# EAGLE board Satellite boards (EAGLE 5.09)
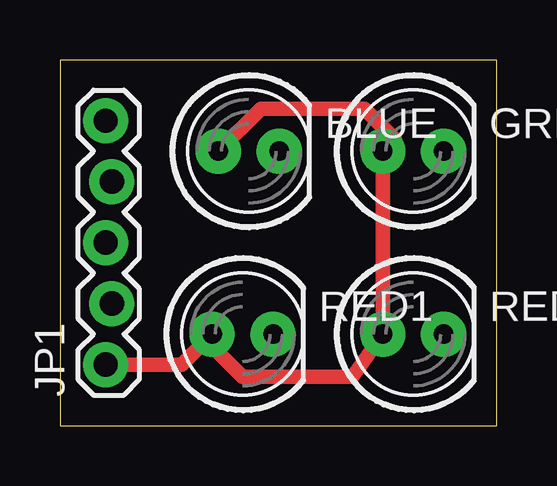
[diagram p0: board, top side]
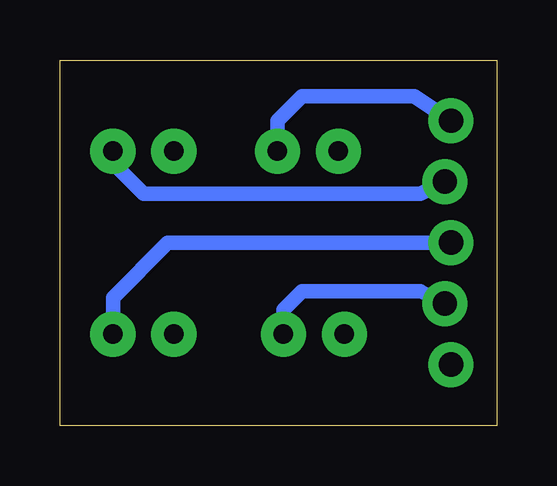
[diagram p1: board, bottom side, seen from below]

Size 18.21 x 15.23 mm. Coordinates in mm from the lower left corner, seen from the top.
Outline: 0,0 18.21,0 18.21,15.23 0,15.23 0,0
Copper layers (1*16): Top 0.035mm / dielectric 1.5mm / Bottom 0.035mm
Design rules "default": minimum track width 10mil, minimum drill 24mil, track to track 8mil, track to pad 8mil, pad to pad 8mil, via to via 8mil, smd to smd 8mil, copper to edge 40mil, drill to drill 8mil, minimum pad ring 10mil, minimum via ring 8mil, stop-mask expansion 4mil, vias tented up to drill 0mil, thermal gap 10mil

## Footprints (pad centres in the part's own frame; a part is rotated, then mirrored left to right if it is on the bottom)
LED5MM = drill 0.813 pad 1.88 round: A -1.27,0; K 1.27,0
1X05_LOCK = drill 1.016 pad 1.88 round: 1 0,0.127; 2 2.54,-0.127; 3 5.08,0.127; 4 7.62,-0.127; 5 10.16,0.127

## Placement (x,y rotation side)
BLUE  [LED5MM]  7.87,11.43 0 top
GREEN  [LED5MM]  14.73,11.43 0 top
JP1  [1X05_LOCK]  2.03,2.54 90 top
RED1  [LED5MM]  7.62,3.81 0 top
RED2  [LED5MM]  14.73,3.81 0 top

## Library data of the parts
BLUE GREEN JP1 RED1 RED2 = SparkFun

## Nets
N$1: BLUE.A GREEN.A JP1.1 RED1.A RED2.A
N$2: JP1.2 RED1.K
N$3: JP1.3 RED2.K
N$4: GREEN.K JP1.4
N$5: BLUE.K JP1.5

## Tracks (layer width: path | path; a pad name or v marks a point on that pad's centre or on a via)
N$1
  Top 0.61: JP1.1 5.08,2.54 RED1.A 6.35,3.3 7.62,2.03 12.19,2.03 RED2.A GREEN.A 13.97,11.94 12.7,13.21 8.38,13.21 BLUE.A
N$2
  Bottom 0.61: RED1.K 8.89,4.83 8.13,5.59 3.17,5.59 JP1.2
N$3
  Bottom 0.61: RED2.K 16,5.33 13.72,7.62 JP1.3
N$4
  Bottom 0.61: GREEN.K 16,10.92 14.73,9.65 3.17,9.65 JP1.4
N$5
  Bottom 0.61: BLUE.K 9.14,12.7 8.13,13.72 3.43,13.72 JP1.5